# Altium PCB Beetech GSM MKR1400.PcbDoc
Units mm, origin at the board's own origin, x right, y up, seen from the top; angles counter-clockwise.
Board outline 90 x 88 mm, 2 copper layers (Top Layer, Bottom Layer), stack 1.671 mm thick; 38 components, 36 nets, 164 pads, 27 vias.
Unrouted connection lines stored in the file: 173.
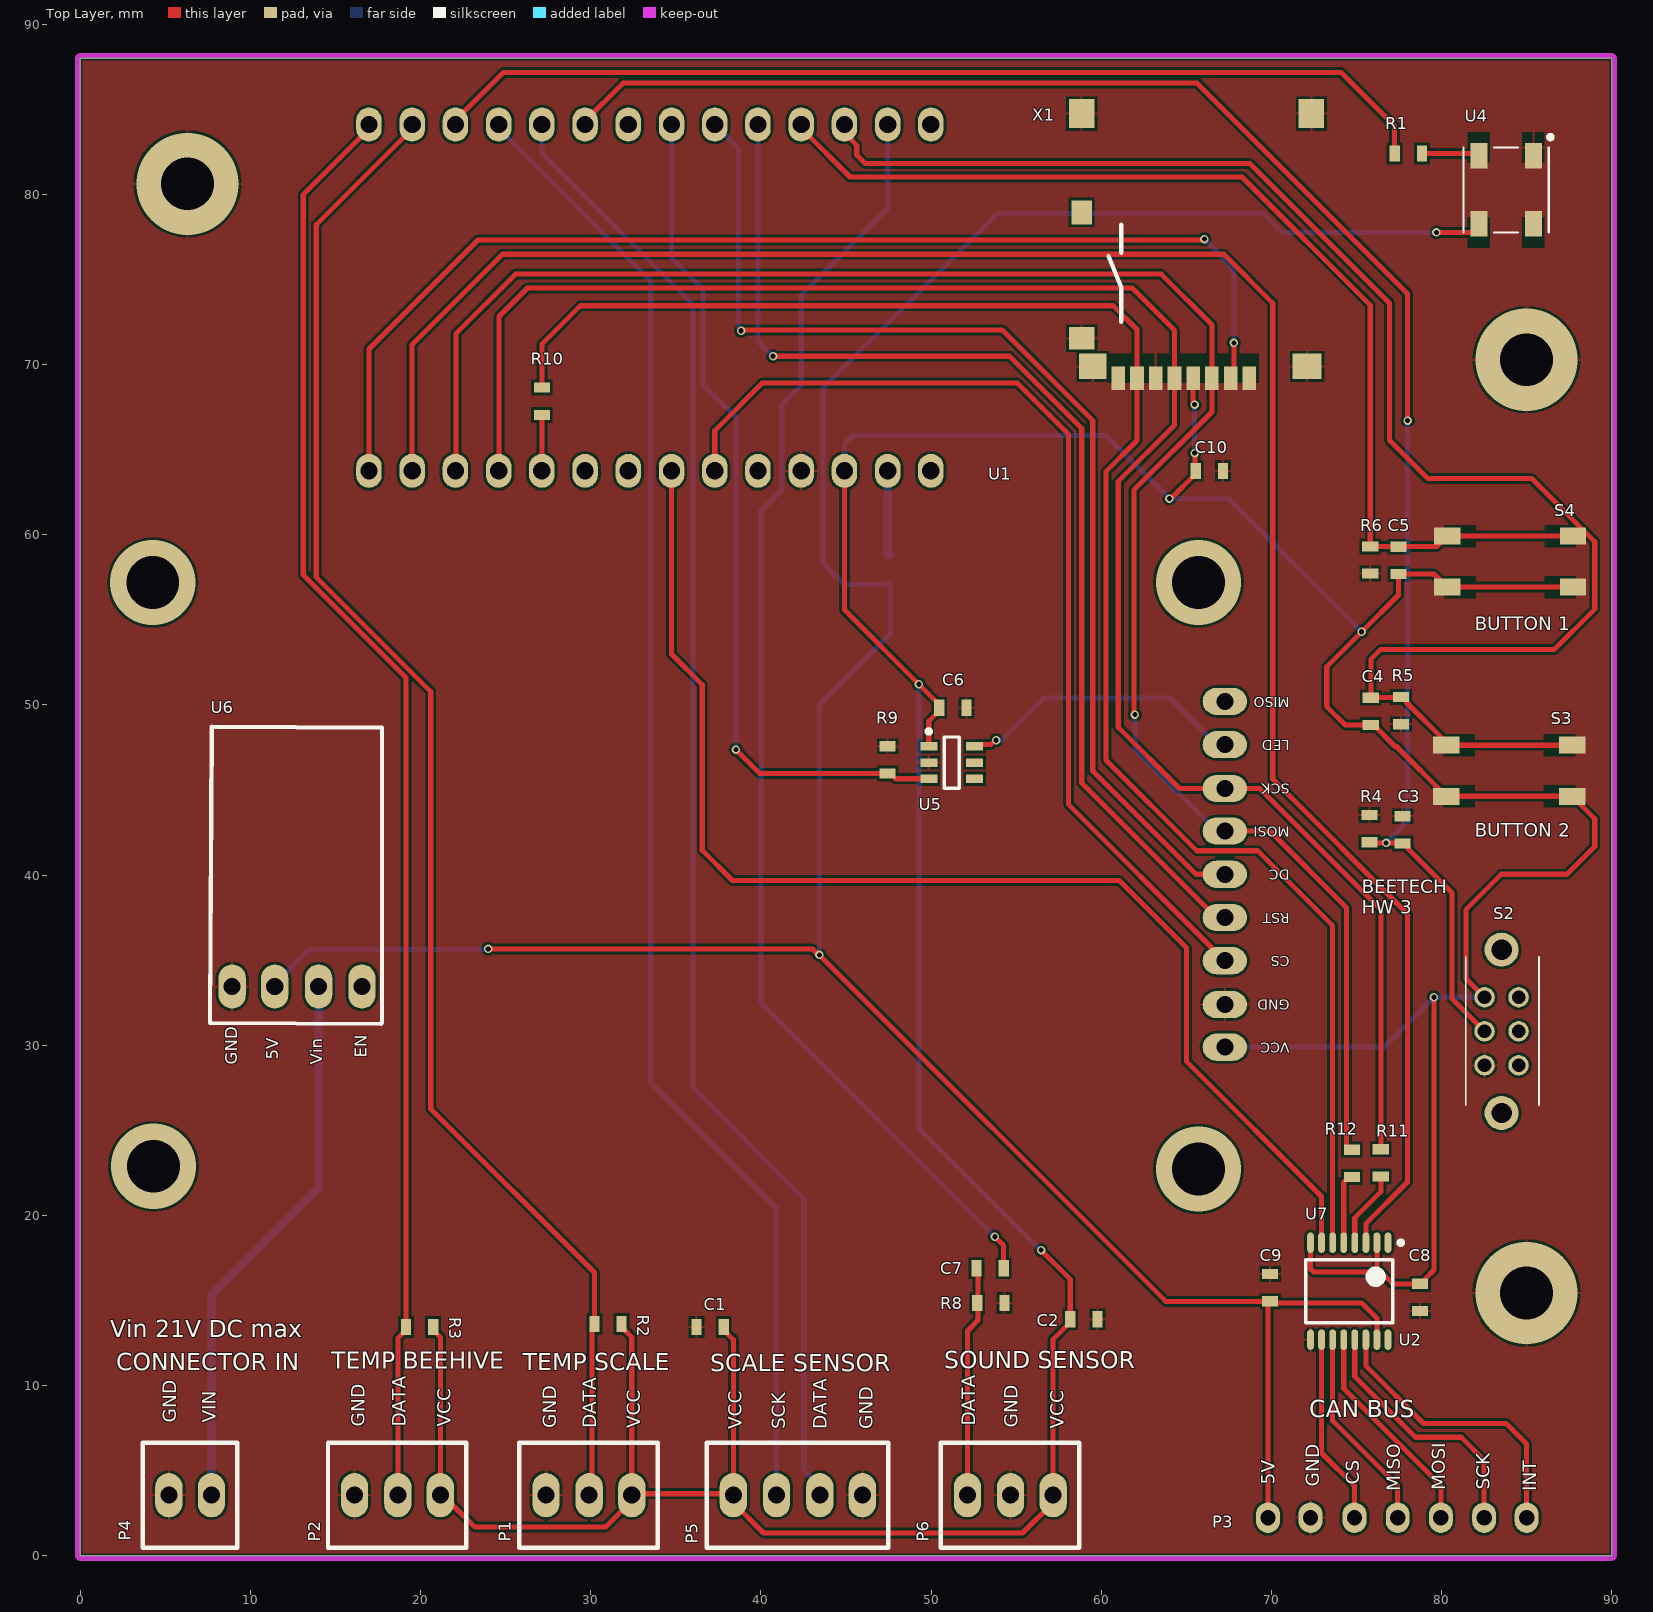
[diagram p0: Top Layer view]
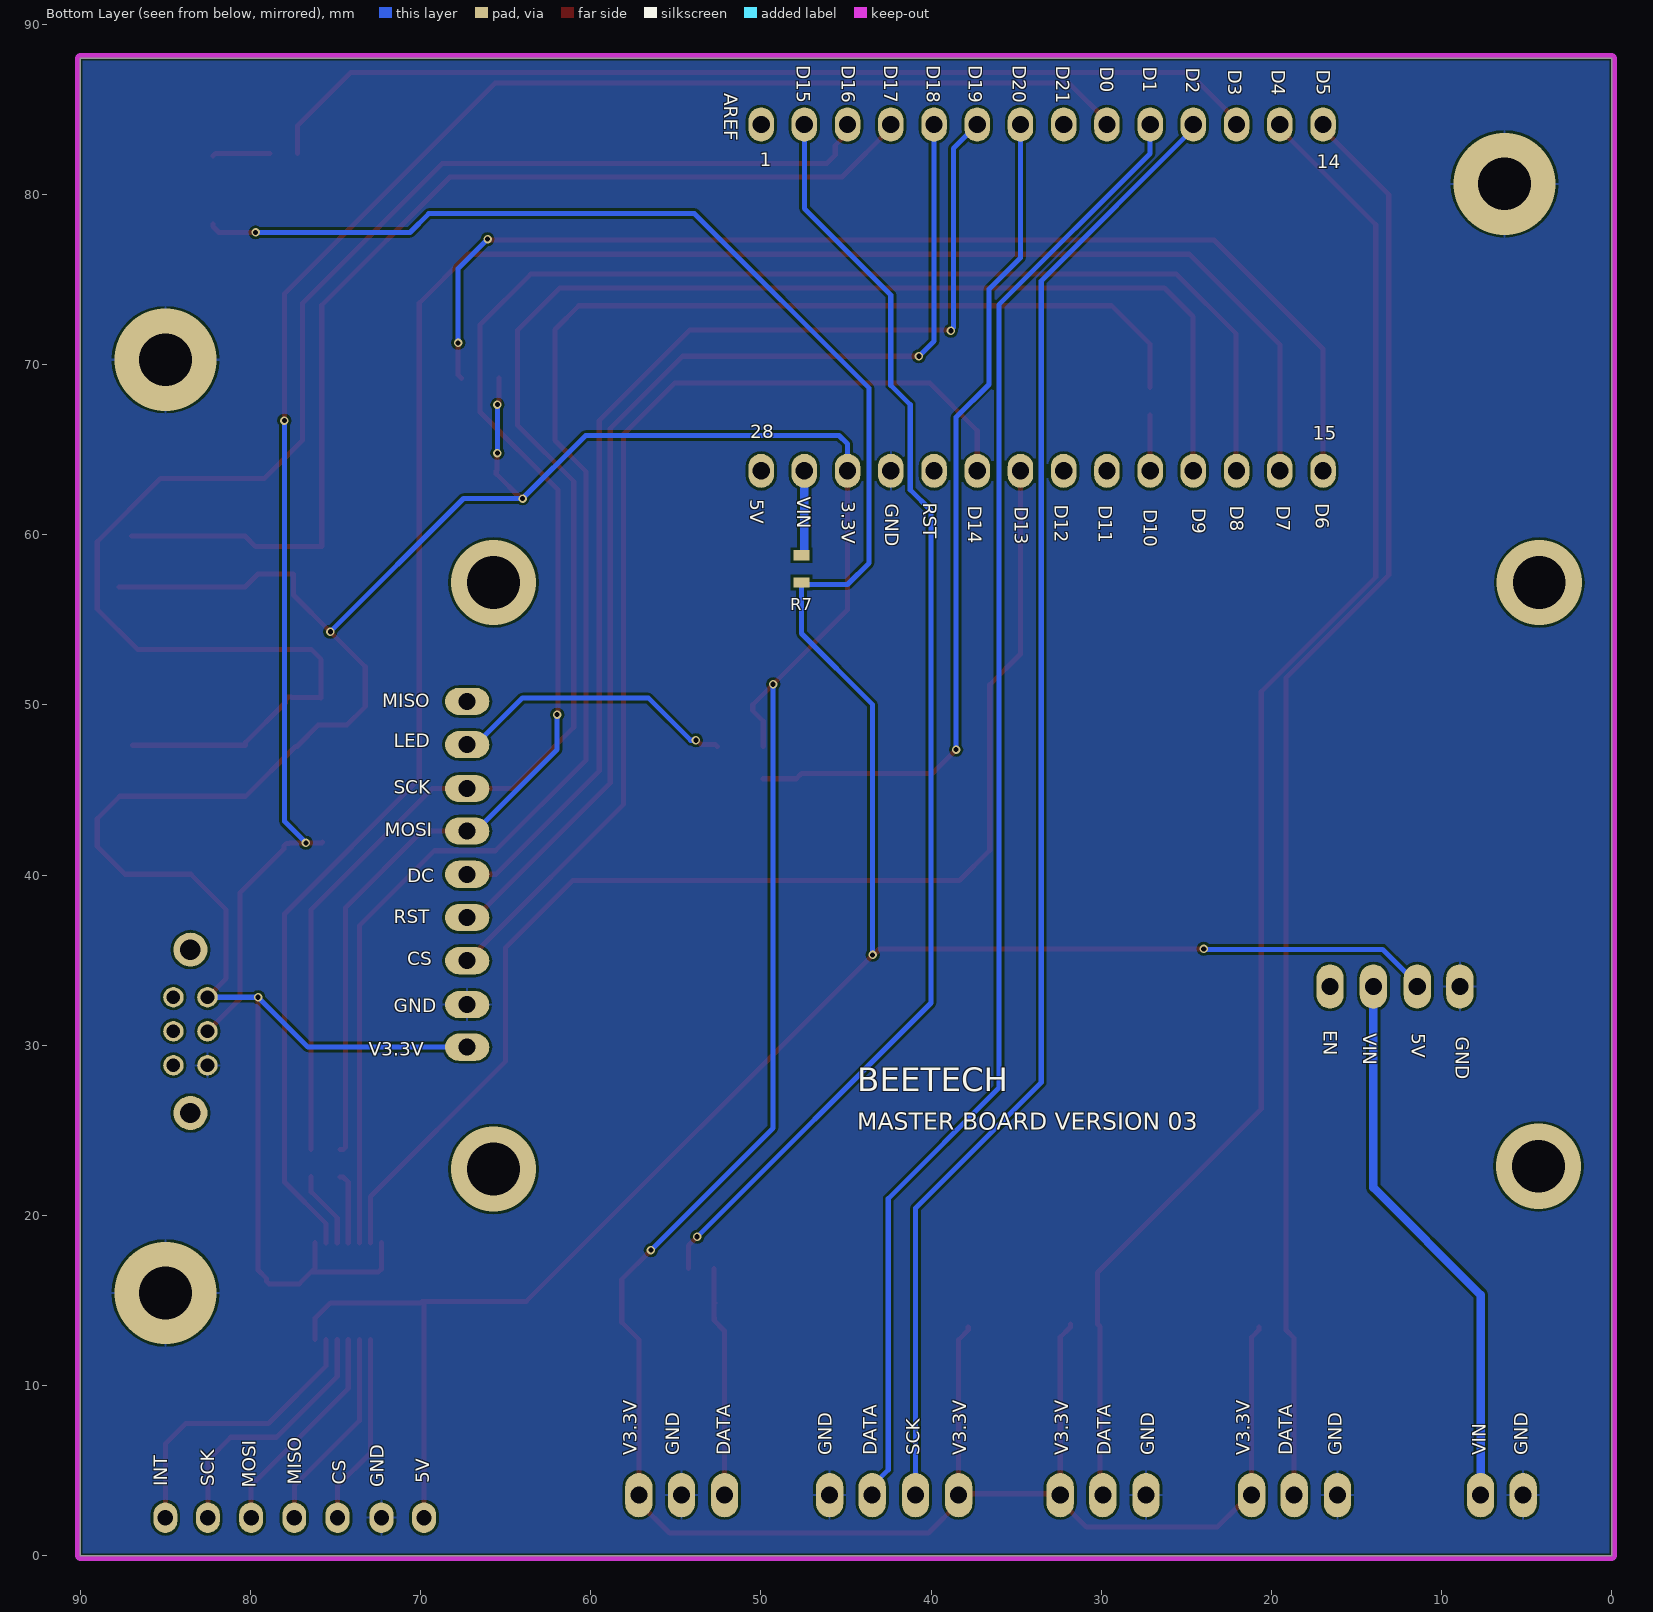
[diagram p1: Bottom Layer view, seen from below]

## Layer stack, top to bottom
Top Solder: solder mask 0.0102, Solder Resist, Dk 3.5
Top Layer: signal copper 0.0356
Dielectric1: core 1.6, FR-4, Dk 4.8
Bottom Layer: signal copper 0.0356
Bottom Solder: solder mask 0.0102, Solder Resist, Dk 3.5

## Board outline
0,0 90,0 90,88 0,88

## Design rules (kind name [scope] priority, off if disabled: settings)
Clearance Clearance_1 [InNamedPolygon('SW_L01_P024')] p1: gap=0.254 ignorepadtopadclearanceinfootprint=FALSE except(0: Arc-Hole Track-Hole SMDPad-Hole THPad-Hole Via-Hole Fill-Hole Poly-Hole Region-Hole Text-Hole)
Clearance [All] p2: gap=0.15 ignorepadtopadclearanceinfootprint=FALSE
ComponentClearance [All] p1: gap=0.001 collisioncheckmode=3 verticalgap=0.254 showdistances=FALSE
FabricationTestPointUsage [All] p1 off: valid=0 allowmultiple=FALSE
FabricationTestpoint [All] p1 off: side=3 testpointundercomponent=TRUE minsize=1.016 maxsize=2.54 preferedsize=1.524 minholesize=0 maxholesize=1.016 preferedholesize=0.813 testpointgrid=0.025 allowsidetop=TRUE allowsidebottom=TRUE usegrid=TRUE gridtolerance=0
HoleSize [All] p1: absolutevalues=TRUE maxlimit=6 minlimit=0.025 maxpercent=80.000 minpercent=20.000
HoleToHoleClearance [All] p1: gap=0 allowstackedmicrovias=TRUE
MinimumSolderMaskSliver [All] p1: minsoldermaskwidth=0
PolygonConnect PolygonConnect_14 [All vs IsNamedPolygon('GND_L01_P041')] p1: connectstyle=Relief reliefconductorwidth=0.15 reliefentries=4 polygonreliefangle="90 Angle" airgapwidth=0.15
PolygonConnect V_BAT_L01_P036 [All vs IsNamedPolygon('V_BAT_L01_P036')] p2: connectstyle=Direct reliefconductorwidth=0.254 reliefentries=4 polygonreliefangle="90 Angle" airgapwidth=0.254
PolygonConnect V_BAT2 [All vs IsNamedPolygon('V_BAT2_L01_P004')] p3: connectstyle=Direct reliefconductorwidth=0.254 reliefentries=4 polygonreliefangle="90 Angle" airgapwidth=0.254
PolygonConnect V_BAT [All vs IsNamedPolygon('V_BAT_L01_P010')] p4: connectstyle=Direct reliefconductorwidth=0.254 reliefentries=4 polygonreliefangle="90 Angle" airgapwidth=0.254
PolygonConnect V_SYS2 [All vs IsNamedPolygon('V_SYS2_L01_P012')] p5: connectstyle=Direct reliefconductorwidth=0.254 reliefentries=4 polygonreliefangle="90 Angle" airgapwidth=0.254
PolygonConnect +3.3b_uBlox [All vs IsNamedPolygon('+3.3V_UBLOX_L01_P014')] p6: connectstyle=Direct reliefconductorwidth=0.254 reliefentries=4 polygonreliefangle="90 Angle" airgapwidth=0.254
PolygonConnect V_LIPO_SYS_L01_P016 [All vs IsNamedPolygon('V_LIPO_SYS_L01_P016')] p7: connectstyle=Direct reliefconductorwidth=0.254 reliefentries=4 polygonreliefangle="90 Angle" airgapwidth=0.254
PolygonConnect V_LIPO_SYS_L01_P020 [All vs IsNamedPolygon('V_LIPO_SYS_L02_P020')] p8: connectstyle=Direct reliefconductorwidth=0.254 reliefentries=4 polygonreliefangle="90 Angle" airgapwidth=0.254
PolygonConnect V_SYS_L02_P024 [All vs IsNamedPolygon('V_SYS_L02_P024')] p9: connectstyle=Direct reliefconductorwidth=0.254 reliefentries=4 polygonreliefangle="90 Angle" airgapwidth=0.254
PolygonConnect VCC_USB_5.0V_L01_P026 [All vs IsNamedPolygon('VCC_USB_5.0V_L01_P026')] p10: connectstyle=Direct reliefconductorwidth=0.254 reliefentries=4 polygonreliefangle="90 Angle" airgapwidth=0.254
PolygonConnect SW [All vs IsNamedPolygon('SW_L01_P008')] p11: connectstyle=Direct reliefconductorwidth=0.254 reliefentries=4 polygonreliefangle="90 Angle" airgapwidth=0.254
PolygonConnect [All] p12: connectstyle=Relief reliefconductorwidth=0.15 reliefentries=4 polygonreliefangle="90 Angle" airgapwidth=0.15
RoutingVias [All] p1: holewidth=0.3 width=0.5 viastyle="Through Hole" minholewidth=0.2 minwidth=0.3 maxholewidth=1.2 maxwidth=2 useviatemplates=TRUE viatemplateguid#1={68F519FB-439D-452A-8ACF-2DE296BA9197} viatemplateguid#2={5ED9683F-E5DF-4E78-BDB1-49E541A8EC46} viatemplateguid#3={FAFF2F81-81C9-46E2-9D3D-D8AEF9417303} viatemplateguid#4={175E6F9D-763D-42D4-A59E-C21ACC7DA2E1} viatemplatename#1=v50h30m0mx0 viatemplatename#2=v50h30m50mx0 viatemplatename#3=v50h20 viatemplatename#4=v50h20mx0
SilkToSilkClearance [All] p1: silktosilkclearance=0.152
SilkToSolderMaskClearance [IsPad] p1: minsilkscreentomaskgap=0.127 clearancetoexposedcopper=TRUE
SolderMaskExpansion [All] p1: expansion=0.102 istentingtop=FALSE
Width [All] p1: maxlimit=5.08 minlimit=0.01 preferedwidth=0.305 minimp=50.000000 maximp=50.000000 favimp=50.000000
22 further rules are at their usual default settings.

## Components (designator, comment, footprint, x,y, rotation, side; value= is the part's Value field where it differs from the comment)
C1 "100nF 0603_1" "CAP 0603" 37.016,13.437 r0 top value=100nF
C2 "100nF 0603_1" "CAP 0603" 58.979,13.894 r180 top value=100nF
C3 "100nF 0603" "CAP 0603" 77.712,42.659 r90 top value=100nF
C4 "100nF 0603" "CAP 0603" 75.842,49.615 r90 top value=100nF
C5 "100nF 0603" "CAP 0603" 77.468,58.496 r90 top value=100nF
C6 "10uF 0603" "CAP 0603" 51.283,49.835 r180 top value=10uF
C7 "100nF 0603" "CAP 0603" 53.467,16.891 r180 top value=100nF
C8 "100nF 0603_1" "CAP 0603" 78.74,15.176 r90 top value=100nF
C9 "100nF 0603_1" "CAP 0603" 69.926,15.748 r270 top value=100nF
C10 "10uF 0603" "CAP 0603" 66.351,63.754 r180 top value=10uF
P1 "3-Pin Right Angle Housing" "3PIN - RND 205-EK254-2.54-03P" 32.41,3.559 r270 top
P2 "3-Pin Right Angle Housing" "3PIN - RND 205-EK254-2.54-03P" 21.162,3.559 r270 top
P3 "8-Pin" 7PIN 69.799,2.235 r90 top
P4 "2-Pin Right Angle Housing" "2PIN - RND 205-EK254-2.54-02P" 7.707,3.559 r270 top
P5 "4-Pin Right Angle Housing" "4PIN - RND 205-EK254-2.54-04P" 45.96,3.559 r270 top
P6 "3-Pin Right Angle Housing" "3PIN - RND 205-EK254-2.54-03P" 57.175,3.559 r270 top
R1 "470 Ohm 0603" "RES 0603 FOOTPRINT" 78.042,82.398 r0 top value=470
R2 "4.7k Ohm 0603" "RES 0603 FOOTPRINT" 31.013,13.614 r180 top value=4.7k
R3 "4.7k Ohm 0603" "RES 0603 FOOTPRINT" 19.939,13.437 r180 top value=4.7k
R4 "10k Ohm 0603" "RES 0603 FOOTPRINT" 75.769,42.727 r270 top value=10k
R5 "10k Ohm 0603" "RES 0603 FOOTPRINT" 77.617,49.665 r90 top value=10k
R6 "10k Ohm 0603" "RES 0603 FOOTPRINT" 75.808,58.514 r90 top value=10k
R7 "0 Ohm 0603" "RES 0603 FOOTPRINT" 47.622,57.995 r270 bottom value=0
R8 "20k Ohm 0603" "RES 0603 FOOTPRINT" 53.518,14.859 r180 top value=20k
R9 "47k Ohm 0603" "RES 0603 FOOTPRINT" 47.447,46.766 r270 top value=47k
R10 "22 Ohm 0603" "RES 0603 FOOTPRINT" 27.127,67.843 r90 top value=22
R11 "22 Ohm 0603" "RES 0603 FOOTPRINT" 76.429,23.089 r270 top value=22
R12 "22 Ohm 0603" "RES 0603 FOOTPRINT" 74.727,23.063 r270 top value=22
S2 "Schiebeschalter EG2207" "Schiebeschalter on-on 2 P, EG2207" 83.525,30.817 r90 top
S3 "Taster Print_SMD_3" "Taster Print - SMD - PTS647SM70SMTR2LFS" 83.98,46.129 r180 top
S4 "Taster Print_SMD_3" "Taster Print - SMD - PTS647SM70SMTR2LFS" 84.023,58.42 r180 top
U1 "Arduino MKR GSM 1400" "Arduino GSM MKR 1400 v2" 53.797,73.944 r180 top locked
U2 "TFT 2.2 SPI 240x320" "TFT 2.2 SPI 240x320" 67.259,29.885 r180 top locked
U4 "neoPixel" "neoPixel 5050 adafruit 1655" 83.795,80.264 r90 top
U5 "TPS22917DBVT" "SOT23 - 6" 51.214,46.612 r0 top
U6 "MPM3610 5V" "MPM3610 Buck Converter" 8.93,33.452 r90 top
U7 "TXB0106" TSSOP-16L 74.574,15.545 r270 top
X1 "SD micro Card Holder_2" "SD Card Holder - micro - 2 - sd Card inserted" 59.602,85.593 r0 top

## Footprints (in the part's own frame and the unit in brackets; to place one, negate y for a bottom-side part, rotate by r counter-clockwise, add the part's x,y. Pads: shape width x height; smd on the part's side, far side on the other; paste and mask are expansions set on the pad)
"2PIN - RND 205-EK254-2.54-02P" [mm] "RND 205-EK254-2.54-02P"
  oval 2.6x1.6 hole 1: 1(0,0) 2(0,-2.5)
  silkscreen extent -3.07,-4.04 3.1,1.52, body extent -3.1,-3.99 3.1,1.55, height 8.51
"3PIN - RND 205-EK254-2.54-03P" [mm] "RND 205-EK254-2.54-03P"
  oval 2.6x1.6 hole 1: 1(0,0) 2(0,-2.5) 3(0,-5.04)
  silkscreen extent -3.07,-6.6 3.1,1.52, body extent -3.1,-6.55 3.1,1.53, height 8.51
"4PIN - RND 205-EK254-2.54-04P" [mm] "RND 205-EK254-2.54-04P"
  oval 2.6x1.6 hole 1: 1(0,0) 2(0,-2.5) 3(0,-5.04) 4(0,-7.58)
  silkscreen extent -3.07,-9.14 3.1,1.52, body extent -3.1,-9.1 3.1,1.52, height 8.51
7PIN [mm]
  oval 1.8x1.4 hole 0.9: 1(0,0) 2(0,-2.5) 3(0,-5.08) 4(0,-7.62) 5(0,-10.16) 6(0,-12.7) 7(0,-15.2)
"Arduino GSM MKR 1400 v2" [mm] "Arduino GSM MKR 1400 v2"
  oval 1.5x2 hole 1.016: 1(3.81,-10.16) 2(6.35,-10.16) 3(8.89,-10.16) 4(11.43,-10.16) 5(13.97,-10.16) 6(16.51,-10.16) 7(19.05,-10.16) 8(21.59,-10.16) 9(24.13,-10.16) 10(26.67,-10.16) 11(29.21,-10.16) 12(31.75,-10.16) 13(34.29,-10.16) 14(36.83,-10.16) 15(36.83,10.19) 16(34.29,10.19) 16(34.29,10.19) 17(31.75,10.19) 18(29.21,10.19) 19(26.67,10.19) 20(24.13,10.19) 21(21.59,10.19) 22(19.05,10.19) 23(16.51,10.19) 24(13.97,10.19) 25(11.43,10.19) 26(8.89,10.19) 27(6.35,10.19) 28(3.81,10.19)
  body extent -22.02,-12.5 49.34,12.5, height 18.11
"CAP 0603" [mm] "CAP 0603"
  rect 0.6x0.95 smd: 1(-0.8,0) 2(0.8,0)
  body extent -0.8,-0.4 0.8,0.4, height 0.8
"MPM3610 Buck Converter" [mm]
  oval 2.6x1.6 hole 1: 1(0,0) 2(0,-2.5) 3(0,-5.08) 4(0,-7.62)
  silkscreen extent -2.2,-8.8 15.26,1.3, body extent -2.2,-8.7 15.2,1.3, height 3.6
"neoPixel 5050 adafruit 1655" [mm] "neoPixel 5050 adafruit 1655"
  rect 1.5x1 smd: 1(2,-1.6) 2(2,1.6) 3(-2,1.6) 4(-2,-1.6)
  silkscreen extent -2.5,-2.73 3.22,2.5, body extent -2.5,-2.5 2.5,2.5, height 2
"RES 0603 FOOTPRINT" [mm] "RES 0603 FOOTPRINT"
  rect 0.6x0.95 smd: 1(-0.8,0) 2(0.8,0)
  body extent -0.8,-0.4 0.8,0.4, height 0.8
"Schiebeschalter on-on 2 P, EG2207" [mm] "Schiebeschalter on-on 2 P, EG2207"
  round 1.2 hole 0.8: 1(-2,1) 2(0,1) 3(2,1) 4(-2,-1) 5(0,-1) 6(2,-1)
  round 2 hole 1.2: 10(-4.8,0) 10(4.8,0)
  silkscreen extent -4.33,-2.2 4.37,2.1, body extent -4.98,-3.05 5.02,2.95, height 7.7
"SD Card Holder - micro - 2 - sd Card inserted" [mm] "micro SD Card holder, Molex Part Number:   502774-0891"
  rect 0.8x1.4 smd: 1(9.1,-16.4) 2(8,-16.4) 3(6.9,-16.4) 4(5.8,-16.4) 5(4.7,-16.4) 6(3.6,-16.4) 7(2.5,-16.4) 8(1.4,-16.4)
  rect 1.2x1.4 smd: 10(-0.75,-6.65)
  rect 1.5x1.3 smd: 20(-0.75,-14.05)
  rect 1.5x1.7 smd: 20(-0.75,-0.85) 20(12.75,-0.85)
  rect 1.6x1.5 smd: 20(-0.1,-15.7)
  rect 1.7x1.5 smd: 20(12.5,-15.7)
  silkscreen extent 0.82,-13.08 1.57,-7.37, body extent -1,-16.1 13.3,2.2, height 1.81
"SOT23 - 6" [mm] "SOT23, 6-Leads, Body 2,90x2,80mm, Pitch 0,95mm, IPC Medium Density"
  rect 1x0.5 smd: 1(-1.35,0.95) 2(-1.35,0) 3(-1.35,-0.95) 4(1.35,-0.95) 5(1.35,0) 6(1.35,0.95)
  silkscreen extent -1.47,-1.5 0.45,1.95, body extent -0.85,-1.5 0.85,1.5, height 1.1
"Taster Print - SMD - PTS647SM70SMTR2LFS" [mm] "https://www.mouser.ch/ProductDetail/CK/PTS647SM70SMTR2LFS?qs=PqoDHHvF64%252Bxl5nIb9IaOw%3D%3D"
  rect 1.55x1 smd: 1(3.7,1.5) 2(-3.7,1.5) 3(3.7,-1.5) 4(-3.7,-1.5)
  body extent -3.28,-2.22 3.22,2.28, height 7.2
"TFT 2.2 SPI 240x320" [mm]
  oval 2.6x1.6 hole 1: 1(0,0) 2(0,-2.5) 3(0,-5.08) 4(0,-7.62) 5(0,-10.16) 6(0,-12.7) 7(0,-15.2) 8(0,-17.78) 9(0,-20.32)
  body extent -1.52,-30.16 65.98,9.84, height 14.41
TSSOP-16L [mm] "TSOP, 16-Leads, Body 5,00x4,40mm, Pitch 0,65mm, IPC High Density"
  oval 1.2x0.4 smd: 1(-2.85,2.275) 2(-2.85,1.625) 3(-2.85,0.975) 4(-2.85,0.325) 5(-2.85,-0.325) 6(-2.85,-0.975) 7(-2.85,-1.625) 8(-2.85,-2.275) 9(2.85,-2.275) 10(2.85,-1.625) 11(2.85,-0.975) 12(2.85,-0.325) 13(2.85,0.325) 14(2.85,0.975) 15(2.85,1.625) 16(2.85,2.275)
  silkscreen extent -2.97,-2.55 1.85,3.15, body extent -2.25,-2.55 2.25,2.55, height 1.2

## Part data
C1 C2 C3 C4 C5 C6 C7 C8 C9 C10: "C CERAMIC SMD", Bezeichnung="C SMD", Haendler=Mouser, housing/footprint=0603
  C1 C2 C8 C9: Haendler Nr=603-CC0603JPX79BB104, Hersteller=Yageo, Hersteller Nr=CC0603JPX7R9BB104, Preis (CHF)=0.15, Umax=50V
  C3 C4 C5 C7: Haendler Nr=710-885012206020, Hersteller=Würth, Hersteller Nr=885012206020, Preis (CHF)=0.05, Umax=10V
  C6 C10: Dielektrikum=X5R, Haendler Nr=810-C1608X5R1A106K, Hersteller=TDK, Hersteller Nr=C1608X5R1A106K080AC, Preis (CHF)=0.5, Umax=10V
P1 P2 P6: library part "3-Pin Screw Terminal", "3-Pin", ComponentLink1Description=Mouser, ComponentLink1URL=https://www.mouser.ch/ProductDetail/TE-Connectivity/640453-2?qs=sGAEpiMZZMs%252bGHln7q6pm5E1Eb6qwPl2KIU5TYv3tVY%3d, Haendler=Distrelec, Haendler Nr=301-27-919, Preis (CHF)=0.60
P3: library part 7-Pin, LatestRevisionDate=17-Jul-2002, LatestRevisionNote="Re-released for DXP Platform.", Publisher="Altium Limited"
P4: library part "2-Pin Screw Terminal", "2-Pin", ComponentLink1Description=Mouser, ComponentLink1URL=https://www.mouser.ch/ProductDetail/TE-Connectivity/640453-2?qs=sGAEpiMZZMs%252bGHln7q6pm5E1Eb6qwPl2KIU5TYv3tVY%3d, Haendler=Distrelec, Haendler Nr=301-27-918, Preis (CHF)=0.60
P5: library part "4-Pin Screw Terminal", "4-Pin", ComponentLink1Description=Mouser, ComponentLink1URL=https://www.mouser.ch/ProductDetail/TE-Connectivity/640453-2?qs=sGAEpiMZZMs%252bGHln7q6pm5E1Eb6qwPl2KIU5TYv3tVY%3d, Haendler=Distrelec, Haendler Nr=301-27-920, Hersteller=RND, Hersteller Nr="RND 205-EK254-2.54-04P", Preis (CHF)=0.60
R1 R2 R3 R4 R5 R6 R7 R8 R9 R10 R11 R12: "R SMD", Bezeichnung="R SMD", Haendler=Mouser, housing/footprint=0603
  R1: Haendler Nr=594-MCT06030C4700FP5, Preis (CHF)=0.15
  R2 R3: Haendler Nr=755-ESR03EZPF4701, Preis (CHF)=0.01
  R4 R5 R6: Haendler Nr=603-AC0603FR-0710KL, Hersteller=Yageo, Hersteller Nr=AC0603FR-0710KL, Preis (CHF)=0.01
  R7: Haendler Nr=667-ERJ-3GEY0R00V, Hersteller=ERJ-3GEY0R00V, Hersteller Nr=Panasonic, Preis (CHF)=0.01
  R8: Haendler Nr=71-CRCW060320K0FKEAC, Preis (CHF)=0.09
  R9: Haendler Nr=603-AC0603FR-0747KL, Hersteller=Yageo, Hersteller Nr=AC0603FR-0747KL, Preis (CHF)=0.01
  R10 R11 R12: Haendler2=Farnell, Haendler2 Nr=2447301, Haendler Nr=603-RC0603FR-0722RL, Preis (CHF)=0.01
S2: "Schiebeschalter on-on PCM12SMTR", ComponentLink1Description=C&K, ComponentLink1URL=https://www.ckswitches.com/products/switches/product-details/Slide/AYZ/AYZ0202AGRLC/, Haendler=Mouser, Haendler Nr=612-EG2207, Hersteller="E SWITCH", Hersteller Nr=EG2207, Preis (CHF)=0.66
S3 S4: library part "Taster Print_SMD_6", "Taster", ComponentLink1Description=link, ComponentLink1URL=https://www.digikey.ch/product-detail/de/wurth-electronics-inc/430473035826/732-7021-1-ND/5225469, Haendler=Mouser, Haendler Nr=611-PTS647SM70SMTR2L, link=https://www.mouser.ch/ProductDetail/CK/PTS647SM70SMTR2LFS?qs=PqoDHHvF64%252Bxl5nIb9IaOw%3D%3D, Preis (CHF)=0.38
U1: "https://store.arduino.cc/arduino-mkr-gsm-1400-1415", ComponentLink3URL=http://ch.farnell.com/stmicroelectronics/stm32l496vgt6/mcu-arm-cortex-m4-80mhz-lqfp-100/dp/2725139?st=STM32L496VGT6, link=https://store.arduino.cc/arduino-mkr-gsm-1400-1415, Preis (CHF)=75
U2: "https://www.banggood.com/1_441_82_02_22_4-Inch-TFT-LCD-Display-Module-Colorful-Screen-Module-SPI-Interface-p-1494883.html?rmmds=search&ID=6211522&cur_warehouse=CN", ComponentLink3URL=http://ch.farnell.com/stmicroelectronics/stm32l496vgt6/mcu-arm-cortex-m4-80mhz-lqfp-100/dp/2725139?st=STM32L496VGT6, Haendler="Banggood / Aliexpress", link=https://www.banggood.com/1_441_82_02_22_4-Inch-TFT-LCD-Display-Module-Colorful-Screen-Module-SPI-Interface-p-1494883.html?rmmds=search&ID=6211522&cur_warehouse=CN, Link 2=https://de.aliexpress.com/item/4000839144387.html?spm=a2g0o.productlist.0.0.48ed5371jjv3wJ&algo_pvid=f087815a-197e-468a-8055-d99fc6734484&algo_expid=f087815a-197e-468a-8055-d99fc6734484-8&btsid=0ab50f6115912653966648062e4a8e&ws_ab_test=searchweb0_0,searchweb201602_,searchweb201603_, Preis (CHF)=6
U4: library part "neoPixel 5050 adafruit 1655", "neoPixel 5050 adafruit 1655", ComponentLink1Description=Mouser, ComponentLink1URL=https://www.mouser.ch/ProductDetail/TE-Connectivity/640453-2?qs=sGAEpiMZZMs%252bGHln7q6pm5E1Eb6qwPl2KIU5TYv3tVY%3d, Haendler=Mouser, Haendler Nr=485-1655, Hersteller=Adafruit, Hersteller Nr=1655, Preis (CHF)=0.60
U5: "High Side Switch", Code_JEDEC="SOT 23-6", Haendler=Mouser, Haendler Nr=595-TPS22917DBVT, Hersteller=TI, Hersteller Nr=TPS22917DBVT, link=https://www.mouser.ch/ProductDetail/Texas-Instruments/TPS22917DBVT?qs=sGAEpiMZZMve4%2fbfQkoj%252bPJ2V24ZqG0%252bKgHGtqls2rU%3d, Preis (CHF)=0.6
U6: library part "MPM3610 5V Buck Converter Breakout", "MPM3610 5V Buck Converter Breakout - 21V In 5V Out at 1.2A", Haendler=Mouser, Haendler Nr=485-4739, Hersteller=Adafruit, Hersteller Typ=4739, link=https://www.adafruit.com/product/4739, Preis (CHF)=5.95
U7: library part "TXB0106 Level Converter", "Level Converter TXB0106", Haendler=Mouser, Haendler2=Farnell, Haendler2 Nr=1694679, Haendler Nr=595-TXB0106PWR, Hersteller="Texas Instruments", Hersteller Nr=TXB0106, link=http://ch.farnell.com/texas-instruments/txb0106pwr/txb-transceiver-tssop16/dp/1694679?ost=1694679&searchView=table&iscrfnonsku=false&ddkey=http%3Ade-CH%2FElement14_Switzerland%2Fsearch, Preis (CHF)=1.45
X1: "SD micro Card  Holder", Haendler=Mouser, Haendler2=Farnell, Haendler2 Nr=2064063, Haendler Nr=538-502774-0891, Hersteller=Molex, Hersteller Nr=502774-0891, Preis (CHF)=3.15

## Via types
v1: diameter 0.5, hole 0.3, Top Layer to Bottom Layer, tented both sides, 20 vias
v2: diameter 5, hole 3.1, Top Layer to Bottom Layer, tented both sides, 4 vias
v3: diameter 6, hole 3.1, Top Layer to Bottom Layer, 3 vias

## Nets (pads, with @x,y where several pads share a name; then routed paths per layer and width w, separated by ;. In a path a pad name is that pad's centre, name@x,y a point inside that pad or via, vN(x,y) a via of type N, cw(c..) or ccw(c..) an arc to the next point about the centre after c; other vN are vias at no path point)
BUTTON_1: C4.2 R5.2 S3.3 S3.4 U1.3 | length 92.7
  Top Layer w0.3: U1.3 44.907,83.606 45.632,82.882 45.632,82.309 46.127,81.813 68.732,81.813 76.937,73.609 76.937,65.547 79.172,63.312 85.281,63.312 89.002,59.591 89.002,55.626 86.639,53.264 76.429,53.264 75.842,52.677 C4.2 75.867,50.44 77.592,50.44 R5.2 77.792,50.465 77.942,50.315 77.942,50.14 80.28,47.802 S3.3 S3.4@86.93,47.629
BUTTON_2: C5.2 R6.2 S4.3 S4.4 U1.4 | length 63.6
  Top Layer w0.3: U1.4 42.367,83.892 45.233,81.026 68.272,81.026 75.808,73.49 R6.2 75.817,59.305 77.459,59.305 C5.2 79.699,59.296 S4.3 S4.4@86.973,59.92
"CAN INT": U1.16 U7.3 | length 120.9
  Top Layer w0.3: U1.16@19.507,63.754 19.507,71.171 24.816,76.479 67.208,76.479 70.079,73.609 70.079,45.644 78.004,37.719 78.004,21.965 75.549,19.511 U7.3
"CAN INT 5V": P3.7 U7.14 | length 17.2
  Top Layer w0.3: U7.14 75.549,11.166 78.943,7.772 83.795,7.772 84.999,6.568 84.999,4.112 P3.7
"CS CAN": U1.22 U7.7 | length 74.5
  Top Layer w0.3: U1.22 34.747,52.988 36.55,51.185 36.55,41.454 38.329,39.675 61.06,39.675 65.021,35.714 65.021,29.035 72.949,21.107 U7.7
"CS CAN 5V": P3.3 U7.10 | length 11.3
  Top Layer w0.3: U7.10 72.949,6.042 74.879,4.112 74.879,3.912 P3.3
"CS SD CARD": U1.15 X1.2 | length 67.9
  Top Layer w0.3: U1.15 16.967,70.917 23.368,77.318 66.015,77.318 v1(66.065,77.368) ; X1.2 67.793,69.384 v1(67.793,71.272)
  Bottom Layer w0.3: v1(66.065,77.368) 67.793,75.641 v1(67.793,71.272)
"CS TFT": U1.23 U2.3 | length 60.4
  Top Layer w0.3: U1.23 37.287,66.116 40.081,68.91 55.067,68.91 58.064,65.913 58.064,44.16 66.51,35.714 66.51,35.566 67.111,34.965 U2.3
DATA_TEMP_1: P1.2 R2.2 U1.13 | length 89.7
  Top Layer w0.3: U1.13 19.507,83.854 13.868,78.215 13.868,57.507 20.599,50.776 20.599,26.259 30.213,16.645 R2.2 30.063,13.464 30.063,3.836 P1.2@29.91,3.682
DATA_TEMP_2: P2.2 R3.2 U1.14 | length 84.7
  Top Layer w0.3: U1.14 16.967,83.854 13.106,79.993 13.106,57.633 19.139,51.6 R3.2 19.139,13.262 18.662,12.785 P2.2@18.662,3.707
"DC TFT": U1.6 U2.5 | length 66.5
  Top Layer w0.3: v1(38.837,71.984) 38.873,72.02 54.193,72.02 59.502,66.711 59.502,46.111 65.568,40.045 U2.5
  Bottom Layer w0.3: U1.6 38.684,82.707 38.684,72.19 38.837,72.038 v1(38.837,71.984)
DT_HX711: P5.2 U1.10 | length 87.3
  Bottom Layer w0.3: U1.10 27.127,82.398 36.017,73.508 36.017,27.483 42.52,20.98 42.52,5.047 43.46,4.107 P5.2@43.46,3.607
GND: C1.1 C2.1 C3.2 C6.1 C8.1 C9.1 C10.1 P1.3 P2.3 P3.2 P4.2 P5.1 P6.2 R4.1 R5.1 R6.1 R8.1 R9.1 S2.1 U1.25 U2.2 U4.1 U5.2 U6.1 U7.9 X1.6 X1.20
  other v3: 84.988,15.443 84.988,70.282 6.299,80.62
"LED TFT": U2.8 U5.6 | length 17
  Top Layer w0.3: U5.6 52.664,47.662 53.511,47.662 53.768,47.919 v1(53.823,47.919)
  Bottom Layer w0.3: v1(53.823,47.919) 54.127,47.919 56.623,50.415 64.009,50.415 66.759,47.665 U2.8
MISO: R10.2 U7.6 X1.7 | length 101.1
  Top Layer w0.3: R10.2 27.127,71.196 29.388,73.457 60.706,73.457 62.102,72.061 X1.7 62.102,65.531 60.269,63.698 60.269,46.766 65.608,41.427 69.19,41.427 73.599,37.018 U7.6
"MISO 5V": P3.4 U7.11 | length 12
  Top Layer w0.3: U7.11 73.599,7.932 77.419,4.112 P3.4
MOSI: R12.1 U1.17 U2.6 X1.3 | length 113.4
  Top Layer w0.3: U1.17@22.073,63.038 22.073,71.806 25.578,75.311 63.525,75.311 66.502,72.335 X1.3@66.502,69.243 ; v1(61.976,49.428) 61.925,49.479 61.925,62.636 66.502,67.213 X1.3 ; U2.6 69.91,42.585 74.402,38.093 74.402,24.013 74.552,23.863 R12.1
  Bottom Layer w0.3: v1(61.976,49.428) 61.976,47.368 66.759,42.585 U2.6
"MOSI 5V": P3.5 U7.12 | length 12.8
  Top Layer w0.3: U7.12 74.249,9.822 79.959,4.112 P3.5
NC: U6.4
NEO_PIX_DATA: R1.1 U1.12 | length 59.5
  Top Layer w0.3: U1.12 22.047,84.354 24.866,87.173 74.092,87.173 77.242,84.023 R1.1
NetC7_2: C7.2 P6.3 R8.2 | length 13.5
  Top Layer w0.3: P6.3@52.135,3.632 52.135,13.213 52.742,13.82 52.742,13.995 52.754,14.007 52.754,14.834 C7.2@52.754,16.881 ; R8.2@52.706,14.847 R8.2
NetR1_2: R1.2 U4.2 | length 3.4
  Top Layer w0.3: R1.2 82.061,82.398 U4.2
NetR10_1: R10.1 U1.19 | length 3.3
  Top Layer w0.3: U1.19 R10.1
NetR11_2: R11.2 U7.4 | length 4.5
  Top Layer w0.3: U7.4 74.899,19.858 76.429,21.387 R11.2
NetR12_2: R12.2 U7.5 | length 4.2
  Top Layer w0.3: U7.5 74.249,21.961 74.552,22.263 R12.2
"RST TFT": U1.5 U2.4 | length 66.4
  Top Layer w0.3: v1(40.716,70.485) 54.61,70.485 58.852,66.243 58.852,45.412 66.759,37.505 U2.4
  Bottom Layer w0.3: U1.5 39.827,71.374 v1(40.716,70.485)
SCK: R11.1 U1.18 U2.7 X1.5 | length 109.5
  Top Layer w0.3: U1.18@24.613,63.41 24.613,72.822 26.284,74.493 61.829,74.493 64.302,72.02 X1.5 64.302,66.435 61.002,63.135 61.002,48.679 64.596,45.085 U2.7 69.317,45.085 76.429,37.973 R11.1
"SCK 5V": P3.6 U7.13 | length 15.2
  Top Layer w0.3: U7.13 74.899,10.528 78.467,6.96 81.153,6.96 82.499,5.613 82.499,4.112 P3.6
SCK_HX711: P5.3 U1.11 | length 87.3
  Bottom Layer w0.3: U1.11 24.587,83.854 33.528,74.913 33.528,27.813 40.92,20.421 P5.3@40.92,3.607
SOUND_DATA: C7.1 U1.2 | length 76.2
  Top Layer w0.3: v1(53.746,18.745) 54.267,18.225 C7.1
  Bottom Layer w0.3: U1.2 47.447,79.172 42.367,74.092 42.367,68.783 41.226,67.642 41.226,62.636 40.005,61.416 40.005,32.487 v1(53.746,18.745)
SWITCH: C3.1 R4.2 S2.2 U1.9 | length 102.5
  Top Layer w0.3: U1.9 29.667,84.31 31.895,86.538 65.634,86.538 78.004,74.168 v1(78.004,66.711) ; R4.2 75.802,41.893 v1(76.74,41.893) 77.679,41.893 C3.1 77.887,41.859 78.037,41.709 78.037,41.534 80.601,38.971 80.601,32.741 S2.2
  Bottom Layer w0.3: v1(76.74,41.893) 78.004,43.156 v1(78.004,66.711)
"TFT LED ENABLE": R9.2 U1.7 U5.3 | length 50.3
  Top Layer w0.3: v1(38.532,47.368) 39.934,45.966 R9.2 47.622,45.966 47.927,45.662 U5.3
  Bottom Layer w0.3: U1.7 34.747,76.276 36.601,74.422 36.601,68.834 38.532,66.904 v1(38.532,47.368)
"V IN": P4.1 U6.3 | length 32.3
  Bottom Layer w0.5: P4.1@7.707,3.785 7.707,15.327 14.01,21.63 U6.3
"V IN uC": R7.1 U1.27 | length 5.1
  Bottom Layer w0.5: U1.27 47.447,58.845 47.497,58.795 R7.1
"VCC 3.3V": C1.2 C2.2 C4.1 C5.1 C6.2 C8.2 C10.2 P1.1 P2.1 P5.4 P6.1 R2.1 R3.1 S2.3 S3.1 S3.2 S4.1 S4.2 U1.26 U2.1 U5.1 U7.2 U7.8 X1.4 | length 284.8
  Top Layer w0.3: R3.1 20.739,13.262 21.162,12.838 21.162,3.707 P2.1 21.763,2.958 21.911,2.958 23.192,1.677 30.862,1.677 32.41,3.225 P1.1@32.41,3.682 ; R2.1 31.813,13.439 32.41,12.843 P1.1@32.41,3.682 ; C1.2 37.816,13.262 38.38,12.698 P5.4@38.38,3.607 ; U1.26 44.907,55.585 v1(49.28,51.212) 50.483,50.01 C6.2 50.483,49.66 49.864,49.041 U5.1 ; v1(56.464,17.958) 58.179,16.243 C2.2 58.179,13.719 57.175,12.715 57.175,3.632 57.175,3.132 55.375,1.332 40.155,1.332 38.38,3.107 P5.4@38.38,3.607 ; v1(64.009,62.127) 64.099,62.127 65.551,63.579 C10.2 65.518,63.787 65.518,64.768 v1(65.485,64.801) ; X1.4 65.402,67.725 v1(65.485,67.642) ; U7.8 72.299,16.857 72.475,16.681 76.419,16.681 ; U7.2 76.199,16.9 76.419,16.681 ; v1(79.547,32.817) 79.547,16.784 79.065,16.301 79.065,16.126 78.915,15.976 C8.2 77.123,15.976 76.419,16.681 ; S2.3 81.425,33.917 81.425,37.965 83.504,40.045 87.365,40.045 89.002,41.681 89.002,43.307 S3.2 S3.1 77.347,47.562 77.27,47.562 76.017,48.815 C4.1 74.336,48.815 73.254,49.897 73.254,52.248 v1(75.302,54.296) 77.468,56.462 C5.1 79.547,57.696 S4.1 S4.2 ; P1.1@32.41,3.682 32.447,3.645 38.342,3.645 P5.4@38.38,3.607
  Bottom Layer w0.3: U1.26 44.907,65.34 45.404,65.837 60.3,65.837 v1(64.009,62.127) 67.47,62.127 v1(75.302,54.296) ; v1(49.28,51.212) 49.28,25.142 v1(56.464,17.958) ; v1(65.485,64.801) v1(65.485,67.642) ; U2.1 76.615,29.885 v1(79.547,32.817) S2.3
"VCC 5V SYS": C9.2 P3.1 R7.2 U4.3 U6.2 U7.15 | length 170.8
  Top Layer w0.3: v1(23.978,35.662) 43.024,35.662 43.38,35.306 v1(43.434,35.306) 63.792,14.948 C9.2 69.799,14.821 69.799,4.112 P3.1 ; C9.2@69.926,14.859 75.301,14.859 76.199,13.961 U7.15 ; v1(79.699,77.764) 81.845,77.764 82.195,78.114 U4.3
  Bottom Layer w0.3: U6.2 11.43,33.6 13.466,35.636 23.952,35.636 v1(23.978,35.662) ; v1(43.434,35.306) 43.434,50.009 47.622,54.198 R7.2 47.501,57.074 44.907,57.074 43.637,58.344 43.637,68.605 53.899,78.867 69.52,78.867 70.623,77.764 v1(79.699,77.764)
pads on no net: S2.4 S2.5 S2.6 S2.10 U1.1 U1.8 U1.20 U1.21 U1.24 U1.28 U2.9 U4.4 U5.4 U5.5 U7.1 U7.16 X1.1 X1.8 X1.10
copper on no net:
  other v2: 65.709,22.725 4.309,22.885 4.259,57.185 65.709,57.195

## Polygon pours and split planes (outlines as drawn)
GND on Top Layer "GND_L01_P002" (solid, pour order 2): 0,0 90,0 90,88 0,88
GND on Bottom Layer "GND_L02_P003" (solid, pour order 3): 0,0 90,0 90,88 0,88

## Keep-outs
Keep-Out Layer:
  lines w0.3: -0.15,0 ccw(c0,0) 0,-0.15 ; -0.15,0 ccw(c0,0) 0,-0.15 ; -0.15,0 -0.15,88 ; -0.15,88 cw(c0,88) 0,88.15 ; -0.15,88 cw(c0,88) 0,88.15 ; 0,-0.15 90,-0.15 ; 0,88.15 90,88.15 ; 90,-0.15 ccw(c90,0) 90.15,0 ; 90,-0.15 ccw(c90,0) 90.15,0 ; 90,88.15 cw(c90,88) 90.15,88 ; 90,88.15 cw(c90,88) 90.15,88 ; 90.15,0 90.15,88

## Silkscreen, mask and mechanical layers (free items; w line width, h text height)
Top Overlay:
  text "BUTTON 1" at 81.945,54.396 h0.8
  text "BUTTON 2" at 81.945,42.236 h0.8
  text "BEETECH / HW 3" at 75.301,37.719 h0.8
  text "Vin 21V DC max" at 1.776,12.851 h1
  text "SOUND SENSOR" at 50.771,11.007 h1
  text "TEMP BEEHIVE" at 14.758,10.982 h1
  text "CONNECTOR IN" at 2.13,10.907 h1
  text "TEMP SCALE" at 26.006,10.907 h1
  text "SCALE SENSOR" at 37.016,10.832 h1
  text "CAN BUS" at 72.224,8.132 h1
  text "GND" at 5.64,7.822 h0.8 r90
  text "VIN" at 7.952,7.822 h0.8 r90
  text "DATA" at 52.597,7.629 h0.8 r90
  text "GND" at 16.709,7.579 h0.8 r90
  text "DATA" at 19.135,7.579 h0.8 r90
  text "VCC" at 21.76,7.579 h0.8 r90
  text "GND" at 55.094,7.529 h0.8 r90
  text "GND" at 27.96,7.504 h0.8 r90
  text "DATA" at 30.314,7.504 h0.8 r90
  text "VCC" at 32.91,7.504 h0.8 r90
  text "VCC" at 57.785,7.454 h0.8 r90
  text "VCC" at 38.86,7.429 h0.8 r90
  text "SCK" at 41.435,7.429 h0.8 r90
  text "DATA" at 43.86,7.429 h0.8 r90
  text "GND" at 46.585,7.429 h0.8 r90
  text "5V" at 70.183,4.163 h0.8 r90
  text "CS" at 75.151,4.163 h0.8 r90
  text "GND" at 72.799,4.061 h0.8 r90
  text "SCK" at 82.832,3.884 h0.8 r90
  text "MOSI" at 80.216,3.833 h0.8 r90
  text "MISO" at 77.574,3.782 h0.8 r90
  text "INT" at 85.575,3.782 h0.8 r90
Bottom Overlay:
  text "D20" at 35.207,87.582 h0.8 r90
  text "D19" at 37.798,87.582 h0.8 r90
  text "D18" at 40.261,87.582 h0.8 r90
  text "D17" at 42.751,87.582 h0.8 r90
  text "D16" at 45.254,87.582 h0.8 r90
  text "D15" at 47.907,87.582 h0.8 r90
  text "D21" at 32.641,87.556 h0.8 r90
  text "D1" at 27.536,87.505 h0.8 r90
  text "D0" at 30.051,87.505 h0.8 r90
  text "D2" at 24.996,87.455 h0.8 r90
  text "D5" at 17.351,87.328 h0.8 r90
  text "D4" at 19.992,87.328 h0.8 r90
  text "D3" at 22.532,87.328 h0.8 r90
  text "AREF" at 52.149,85.956 h0.8 r90
  text "1" at 50.072,81.658 h0.8
  text "14" at 17.351,81.532 h0.8
  text "28" at 50.614,65.681 h0.8
  text "15" at 17.58,65.58 h0.8
  text "VIN" at 47.856,62.232 h0.8 r90
  text "5V" at 50.614,62.082 h0.8 r90
  text "3.3V" at 45.254,61.977 h0.8 r90
  text "RST" at 40.465,61.876 h0.8 r90
  text "D6" at 17.401,61.851 h0.8 r90
  text "GND" at 42.7,61.827 h0.8 r90
  text "D12" at 32.743,61.75 h0.8 r90
  text "D11" at 30.152,61.724 h0.8 r90
  text "D7" at 19.687,61.699 h0.8 r90
  text "D8" at 22.405,61.699 h0.8 r90
  text "D14" at 37.823,61.699 h0.8 r90
  text "D13" at 35.08,61.648 h0.8 r90
  text "D9" at 24.666,61.549 h0.8 r90
  text "D10" at 27.511,61.496 h0.8 r90
  text "MISO" at 72.249,49.858 h0.8
  text "LED" at 71.582,47.518 h0.8
  text "SCK" at 71.582,44.779 h0.8
  text "MOSI" at 72.115,42.286 h0.8
  text "DC" at 70.783,39.571 h0.8
  text "RST" at 71.582,37.168 h0.8
  text "CS" at 70.783,34.694 h0.8
  text "GND" at 71.582,31.925 h0.8
  text "EN" at 16.919,30.889 h0.8 r90
  text "5V" at 11.763,30.711 h0.8 r90
  text "VIN" at 14.608,30.711 h0.8 r90
  text "GND" at 9.172,30.508 h0.8 r90
  text "V3.3V" at 73.048,29.385 h0.8
  text "BEETECH" at 44.332,27.287 h1.4
  text "MASTER BOARD VERSION 03" at 44.326,25.041 h1
  text "GND" at 4.925,5.902 h0.8 r270
  text "VIN" at 7.414,5.902 h0.8 r270
  text "GND" at 15.862,5.902 h0.8 r270
  text "DATA" at 18.787,5.902 h0.8 r270
  text "V3.3V" at 21.282,5.902 h0.8 r270
  text "GND" at 26.896,5.902 h0.8 r270
  text "DATA" at 29.436,5.902 h0.8 r270
  text "V3.3V" at 31.938,5.902 h0.8 r270
  text "V3.3V" at 37.94,5.902 h0.8 r270
  text "SCK" at 40.663,5.902 h0.8 r270
  text "DATA" at 43.203,5.902 h0.8 r270
  text "GND" at 45.845,5.902 h0.8 r270
  text "DATA" at 51.799,5.902 h0.8 r270
  text "GND" at 54.799,5.902 h0.8 r270
  text "V3.3V" at 57.299,5.902 h0.8 r270
  text "5V" at 69.477,4.261 h0.8 r270
  text "MISO" at 76.999,4.184 h0.8 r270
  text "CS" at 74.399,4.163 h0.8 r270
  text "SCK" at 82.116,4.087 h0.8 r270
  text "INT" at 84.884,4.087 h0.8 r270
  text "GND" at 72.174,4.034 h0.8 r270
  text "MOSI" at 79.697,3.983 h0.8 r270

## Text inside footprints (layer, text, board x,y; h text height)
U2: Top Overlay "DC" at 71.069,40.299 h0.6 r180; Top Overlay "RST" at 71.069,37.759 h0.6 r180; Top Overlay "VCC" at 71.069,30.139 h0.6 r180; Top Overlay "GND" at 71.069,32.679 h0.6 r180; Top Overlay "CS" at 71.069,35.219 h0.6 r180; Top Overlay "LED" at 71.069,47.919 h0.6 r180; Top Overlay "SCK" at 71.069,45.379 h0.6 r180; Top Overlay "MOSI" at 71.069,42.839 h0.6 r180; Top Overlay "MISO" at 71.069,50.459 h0.6 r180
U6: Top Overlay "EN" at 16.83,29.252 h0.7 r90; Top Overlay "GND" at 9.23,28.852 h0.7 r90; Top Overlay "5V" at 11.63,29.152 h0.7 r90; Top Overlay "Vin" at 14.23,28.852 h0.7 r90